# Altium PCB pcb1.PcbDoc
Units mil, origin at the board's own origin, x right, y up, seen from the top; angles counter-clockwise.
Board outline 965.03 x 1000.03 mil, 2 copper layers (Top Layer, Bottom Layer); 9 components, 6 nets, 19 pads, 0 vias.
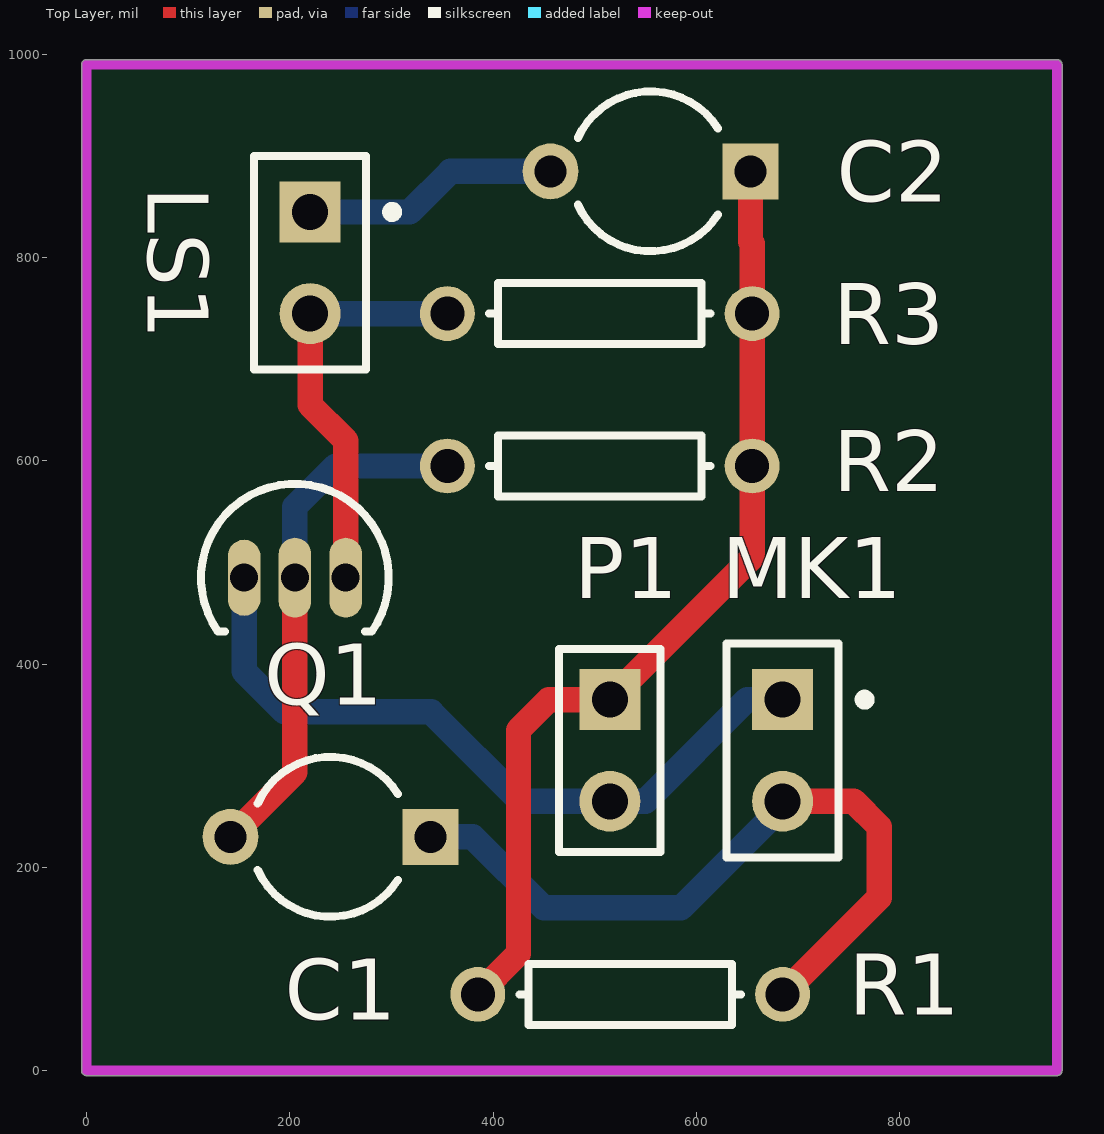
[diagram p0: Top Layer view]
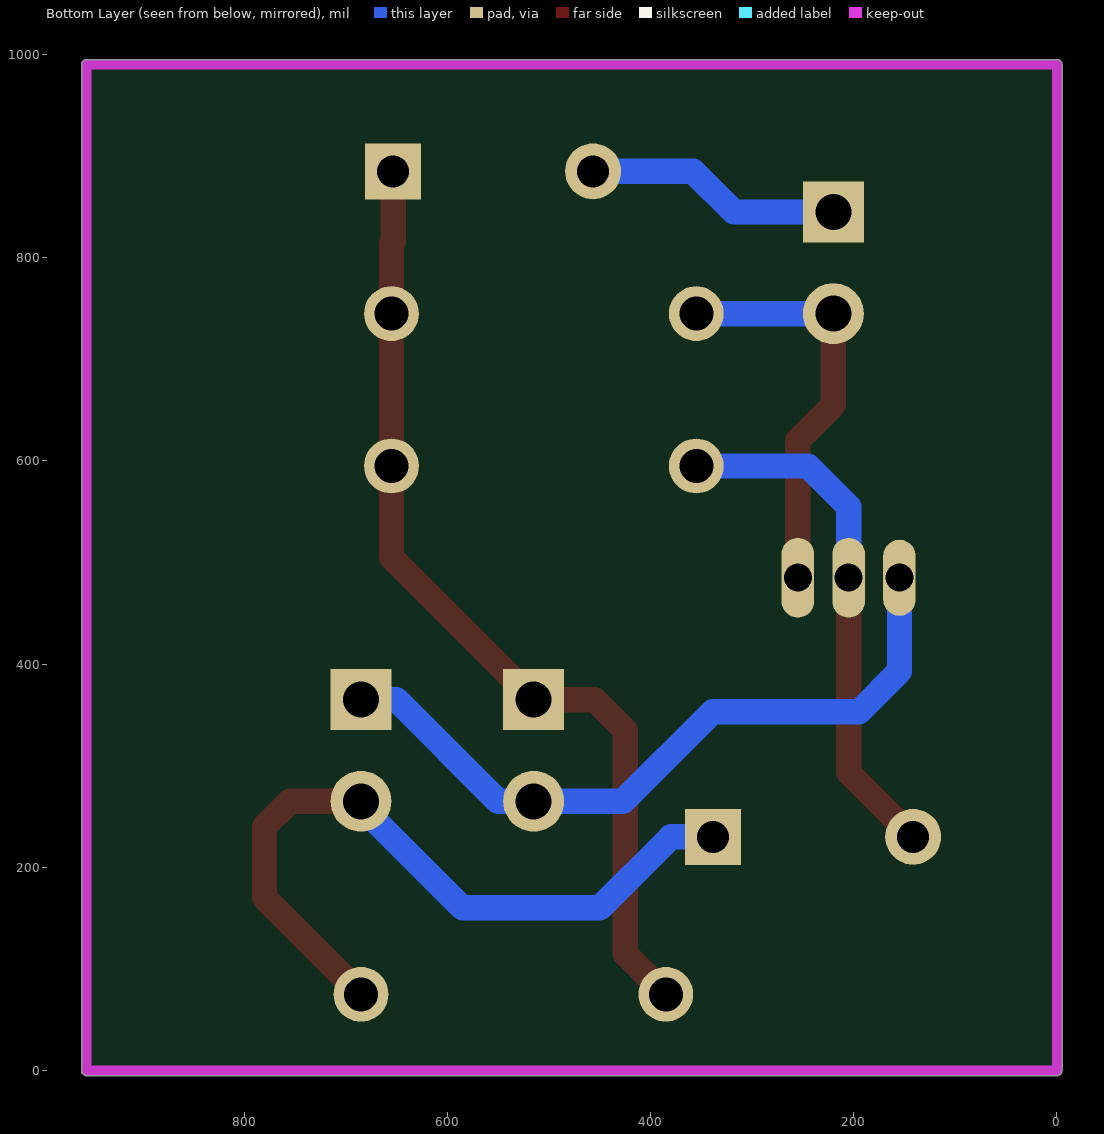
[diagram p1: Bottom Layer view, seen from below]

## Layer stack, top to bottom
Top Solder: solder mask 0.4, Solder Resist, Dk 3.5
Top Layer: signal copper 1.4
Dielectric 1: dielectric 12.6, FR-4, Dk 4.8
Bottom Layer: signal copper 1.4
Bottom Solder: solder mask 0.4, Solder Resist, Dk 3.5

## Board outline
0,-5.01 cw(c0,0) -5.01,0 -5.01,990 cw(c0,990) 0,995.01 955,995.01 cw(c955,990) 960.01,990 960.01,0 cw(c955,0) 955,-5.01

## Design rules (kind name [scope] priority, off if disabled: settings)
Clearance [All] p1: gap=10 ignorepadtopadclearanceinfootprint=FALSE except(0: Arc-Hole Track-Hole SMDPad-Hole THPad-Hole Via-Hole Fill-Hole Poly-Hole Region-Hole Text-Hole)
PolygonConnect [All] p1: connectstyle=Relief reliefconductorwidth=10 reliefentries=4 polygonreliefangle="90 Angle" airgapwidth=10
RoutingVias [All] p1: holewidth=28 width=50 viastyle="Through Hole" minholewidth=28 minwidth=50 maxholewidth=28 maxwidth=50
SolderMaskExpansion [All] p1: expansion=4
Width [All] p1: maxlimit=25 minlimit=25 preferedwidth=25
30 further rules are at their usual default settings.

## Components (designator, comment, footprint, x,y, rotation, side; value= is the part's Value field where it differs from the comment)
C1 "Cap Pol2" CAPR5-4X5 240,230 r180 top value=1uF
C2 "Cap Pol2" CAPR5-4X5 555,885 r180 top value=1uF
LS1 "Speaker" PIN2 220,845 r270 top
MK1 "Mic2" PIN2 685,365 r270 top
P1 "5V_DC" HDR1X2 515,365 r270 top
Q1 "9014c" TO-92 205,485 r270 top
R1 "2k" AXIAL-0.3 535,75 r180 top value=1K
R2 "43k" AXIAL-0.3 505,595 r0 top value=1K
R3 "250" AXIAL-0.3 505,745 r0 top value=1K

## Footprints (in the part's own frame and the unit in brackets; to place one, negate y for a bottom-side part, rotate by r counter-clockwise, add the part's x,y. Pads: shape width x height; smd on the part's side, far side on the other; paste and mask are expansions set on the pad)
AXIAL-0.3 [mil] "Axial Device, Thru-Hole; 2 Leads; 0.3 in Pin Spacing"
  round 54 hole 33.46: 1(-150,0) 2(150,0)
  silkscreen extent -109,-30 109,30
CAPR5-4X5 [mil] "Capacitor; 2 Leads"
  rect 55x55 hole 31.5: 1(-98.43,0)
  round 55 hole 31.5: 2(98.43,0)
  silkscreen extent -66,-79 72,79
HDR1X2 [mil] "Connector; Header; 2 Position"
  rect 60x60 hole 35.43: 1(0,0)
  round 60 hole 35.43: 2(100,0)
  silkscreen extent -50,-50 150,50
PIN2 [mil] "Photosensitive Diode; 2 Leads"
  rect 60x60 hole 35.43: 1(0,0)
  round 60 hole 35.43: 2(100,0)
  silkscreen extent -55,-55 155,86
TO-92 [mm] "TO, Flat Index; 3 In-Line, Axial Leads; Body Dia. 4.6mm; Leads 0.41 x 0.39 mm (max)"
  oval 2x0.813 hole 0.7: 1(0,1.27) 2(0,0)
  oval 1.905x0.813 hole 0.7: 3(0,-1.27)
  silkscreen extent -2.34,-2.34 1.35,2.34

## Part data
C1 C2: "Polarized Capacitor (Axial)", LatestRevisionDate=17-Jul-2002, LatestRevisionNote="Re-released for DXP Platform.", PackageDescription="Polarized Capacitor; 2 Leads", PackageReference=POLAR0.8, Published=8-Jun-2000, Publisher="Altium Limited"
LS1: "Loudspeaker", LatestRevisionDate=17-Jul-2002, LatestRevisionNote="Re-released for DXP Platform.", PackageReference=PIN2, Published=24-Mar-1999, Publisher="Altium Limited"
MK1: "Microphone", LatestRevisionDate=17-Jul-2002, LatestRevisionNote="Re-released for DXP Platform.", PackageReference=PIN2, Published=24-Mar-1999, Publisher="Altium Limited"
P1: library part "Header 2", "Header, 2-Pin", LatestRevisionDate=17-Jul-2002, LatestRevisionNote="Re-released for DXP Platform.", Publisher="Altium Limited"
Q1: library part NPN, "NPN Bipolar Transistor", Code_JEDEC=TO-226-AA, LatestRevisionDate=17-Jul-2002, LatestRevisionNote="Re-released for DXP Platform.", PackageDescription="TO, Flat Index; 3 In-Line, Axial Leads; Body Dia. 4.8mm; Leads 0.55 x 0.51 mm (max)", PackageReference=TO-226-AA, Published=8-Jun-2000, Publisher="Altium Limited"
R1 R2 R3: library part Res2, "Resistor", LatestRevisionDate=17-Jul-2002, LatestRevisionNote="Re-released for DXP Platform.", PackageDescription="Axial Device, Thru-Hole; 2 Leads; 0.4 in Pin Spacing", PackageReference=AXIAL-0.4, Published=8-Jun-2000, Publisher="Altium Limited"

## Nets (pads, with @x,y where several pads share a name; then routed paths per layer and width w, separated by ;. In a path a pad name is that pad's centre, name@x,y a point inside that pad or via, vN(x,y) a via of type N, cw(c..) or ccw(c..) an arc to the next point about the centre after c; other vN are vias at no path point)
GND: MK1.1 P1.2 Q1.3 | length 706.4
  Bottom Layer w25: Q1.3@155,475 155,393 195,353 339,353 427,265 P1.2 550,265 650,365 MK1.1
NetC1_1: C1.1 MK1.2 R1.1 | length 731.7
  Top Layer w25: R1.1 780,170 780,240 755,265 MK1.2
  Bottom Layer w25: C1.1 380,230 450,160 585,160 685,260 MK1.2
NetC1_2: C1.2 Q1.2 R2.1 | length 517.8
  Top Layer w25: C1.2 205,293.43 Q1.2@205,475
  Bottom Layer w25: Q1.2@205,475 Q1.2 205,555 245,595 R2.1
NetC2_2: C2.2 LS1.1 | length 253.1
  Bottom Layer w25: LS1.1 318,845 358,885 C2.2
NetLS1_2: LS1.2 Q1.1 R3.1 | length 419.5
  Top Layer w25: LS1.2 220,655 255,620 Q1.1 Q1.1@255,475
  Bottom Layer w25: LS1.2 R3.1
VCC: C2.1 P1.1 R1.2 R2.2 R3.2 | length 1047.6
  Top Layer w25: R1.2 425,115 425,335 455,365 P1.1 655,505 ; C2.1 653.43,815.57 655,814 R3.2 655,505 ; R2.2 655,505

## Keep-outs
Keep-Out Layer:
  lines w10: 0,0 238.75,0 716.25,0 955,0 955,990 0,990 0,0